# Altium PCB 4Layer_Imposition.PcbDoc
Units mm, origin at the board's own origin, x right, y up, seen from the top; angles counter-clockwise.
Board outline 120 x 170 mm, 4 copper layers (L1, L2, L3, L4), stack 1.486 mm thick; 4 components, 49 nets, 8 pads, 0 vias.
Unrouted connection lines stored in the file: 1.
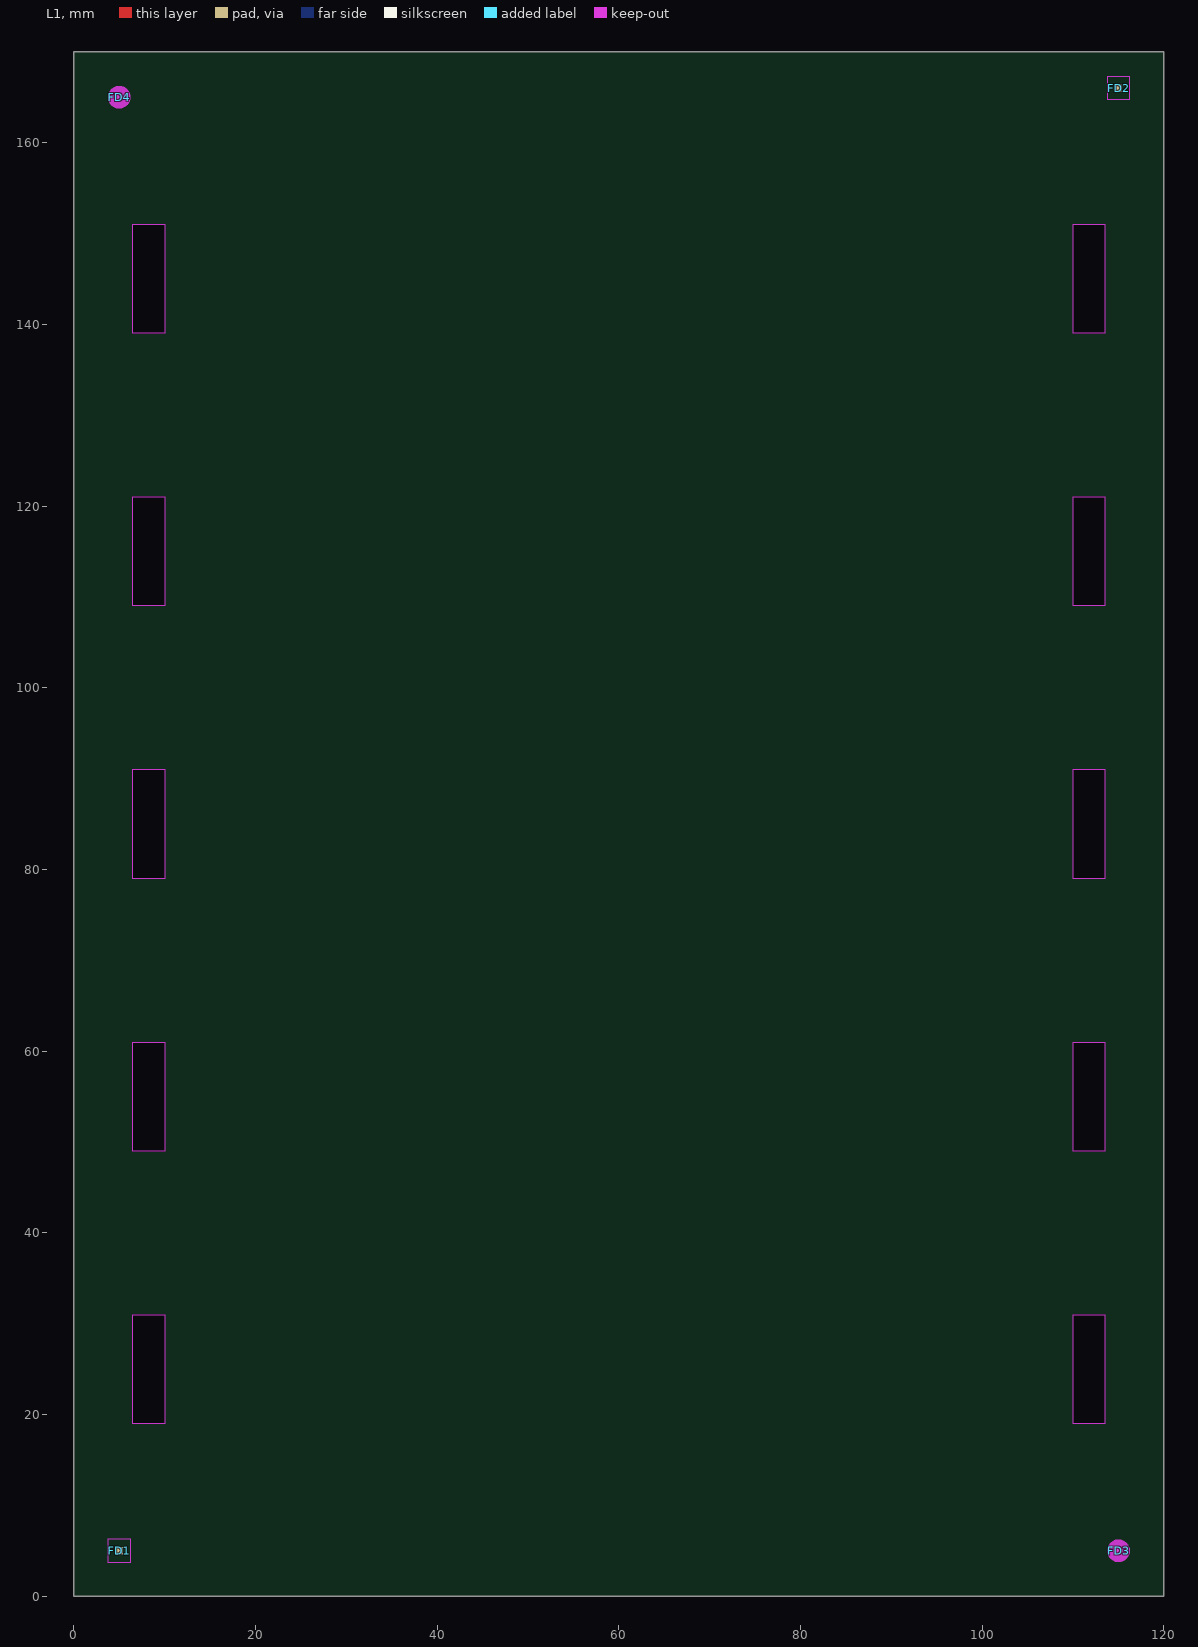
[diagram p0: L1 view]
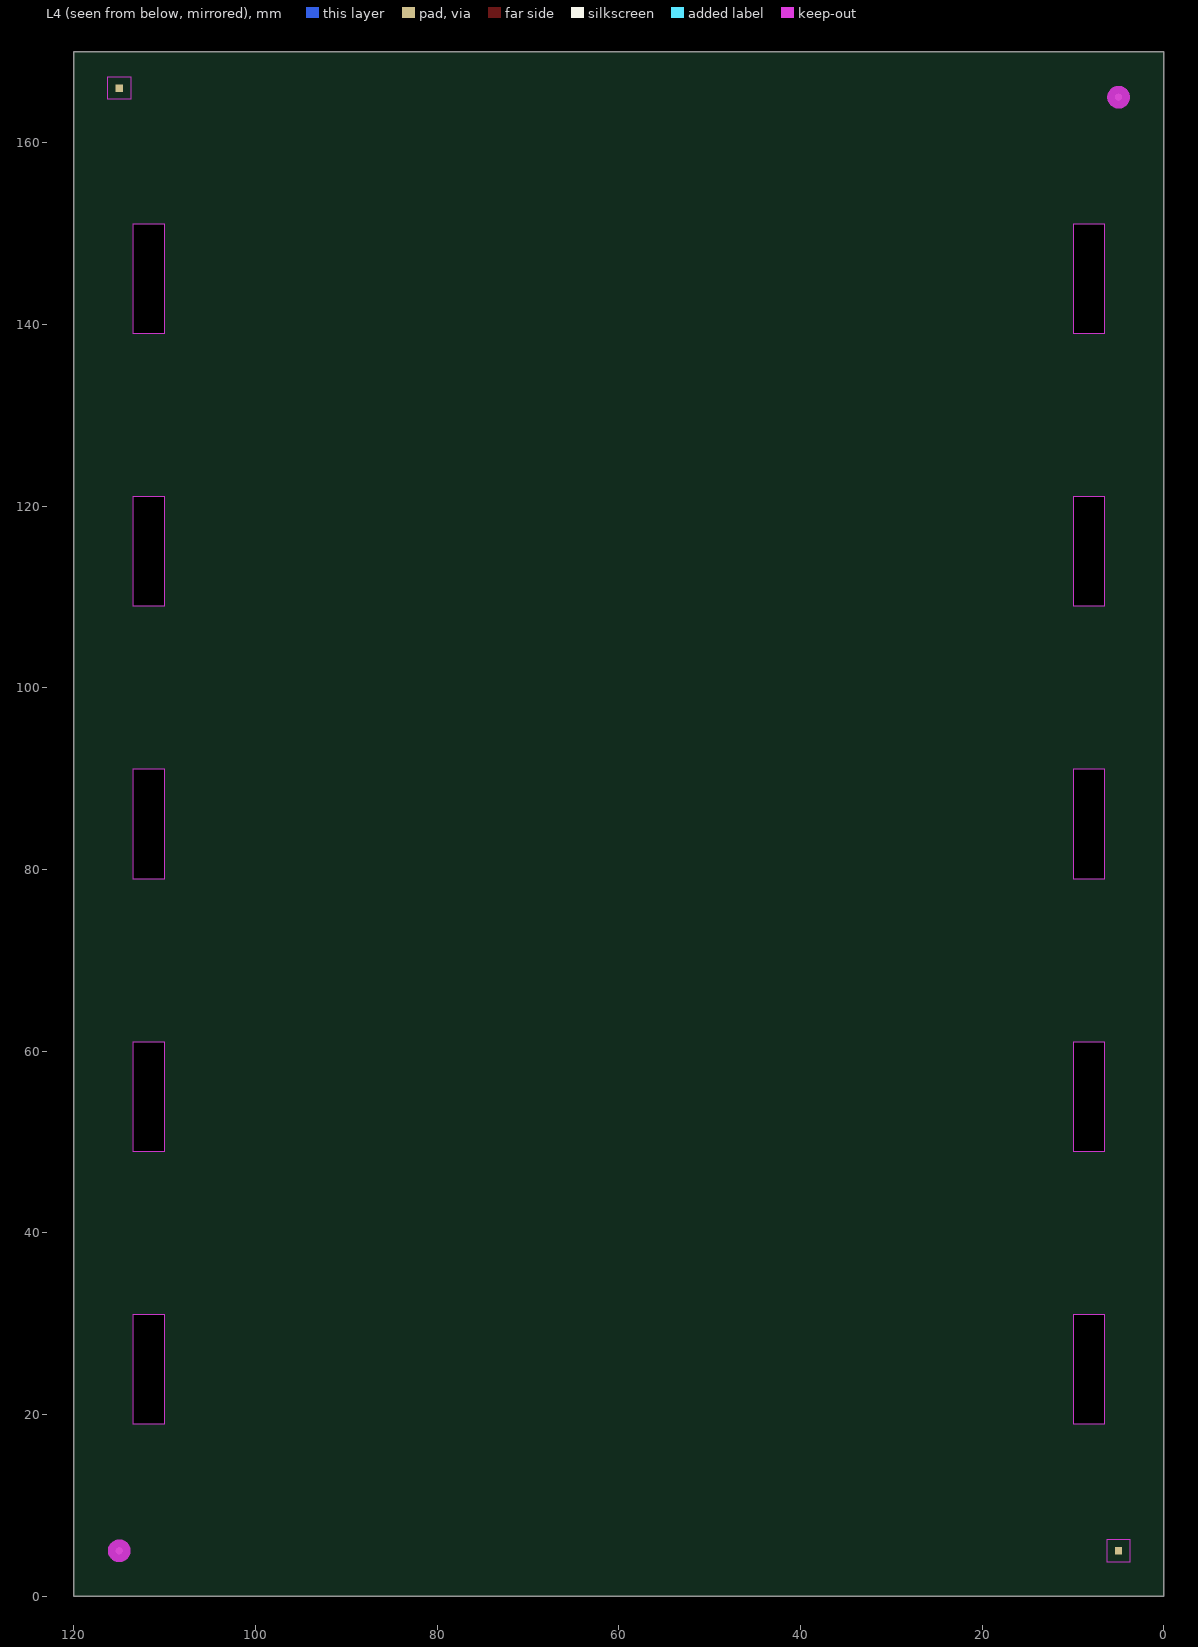
[diagram p1: L4 view, seen from below]
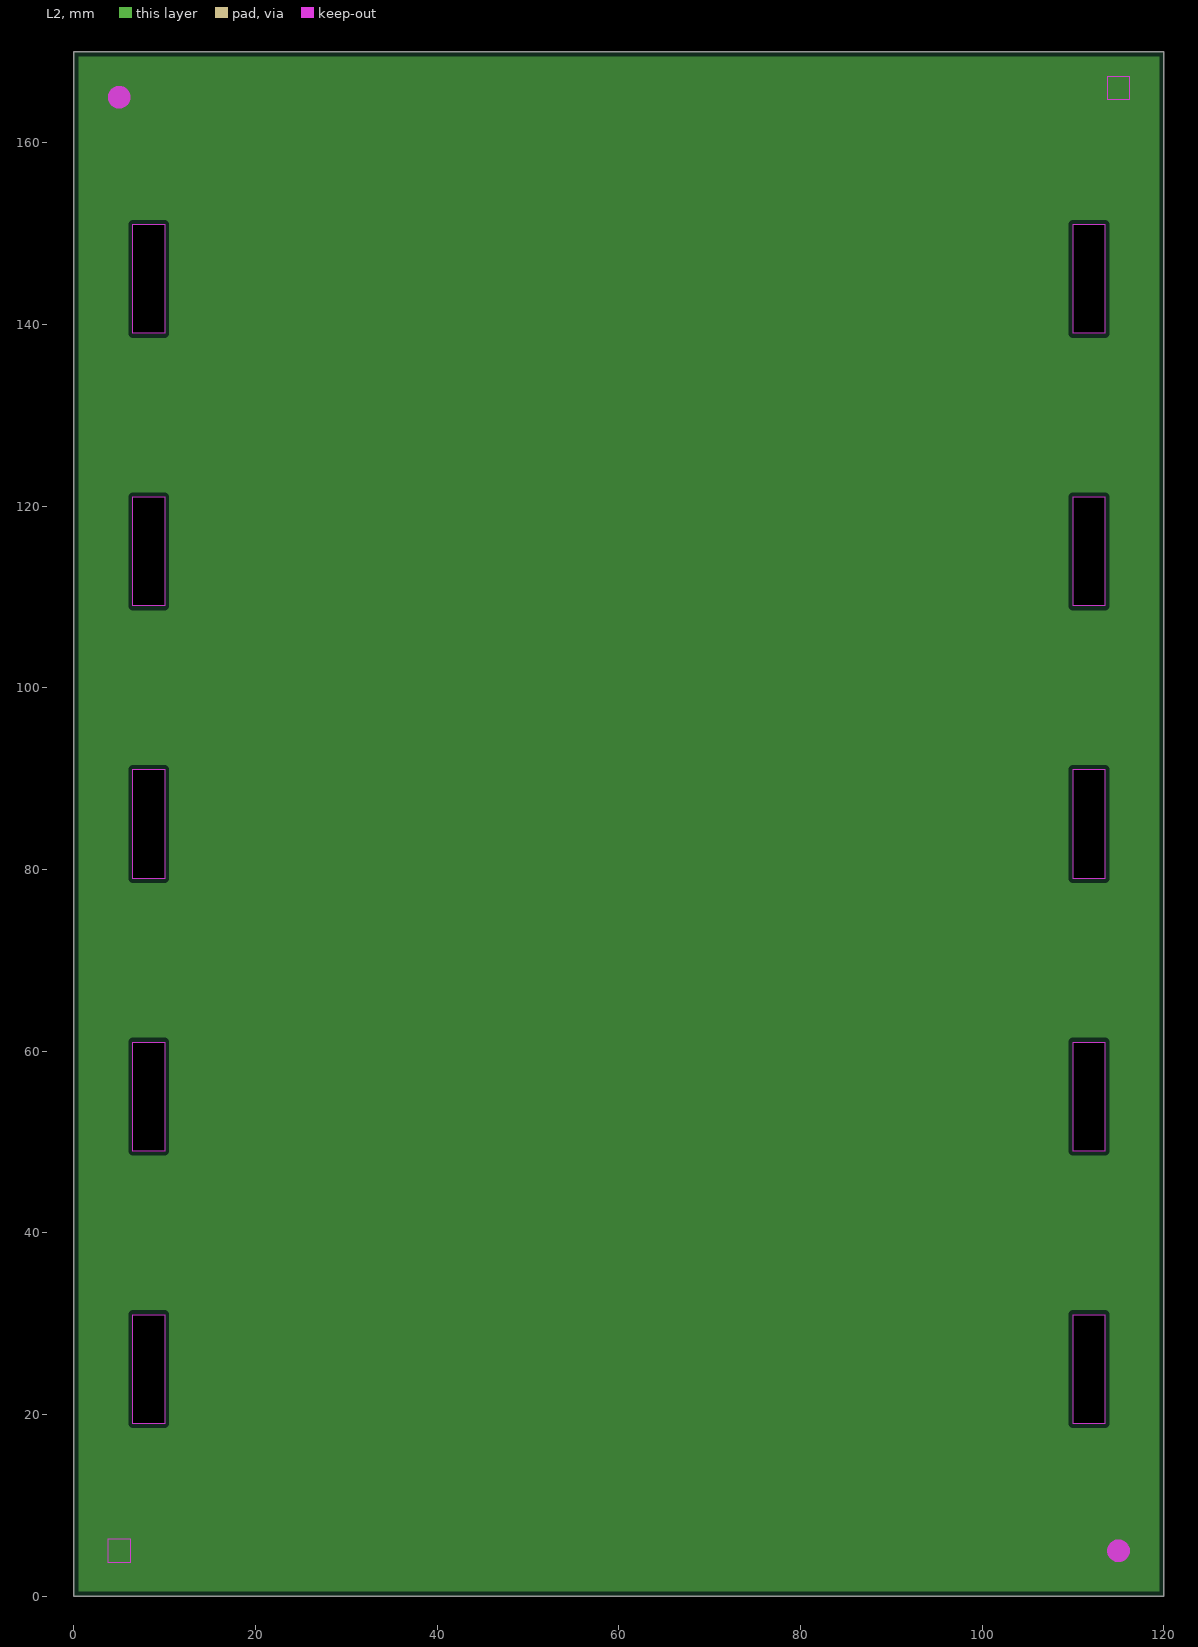
[diagram p2: L2, clearances drawn from the general rule]
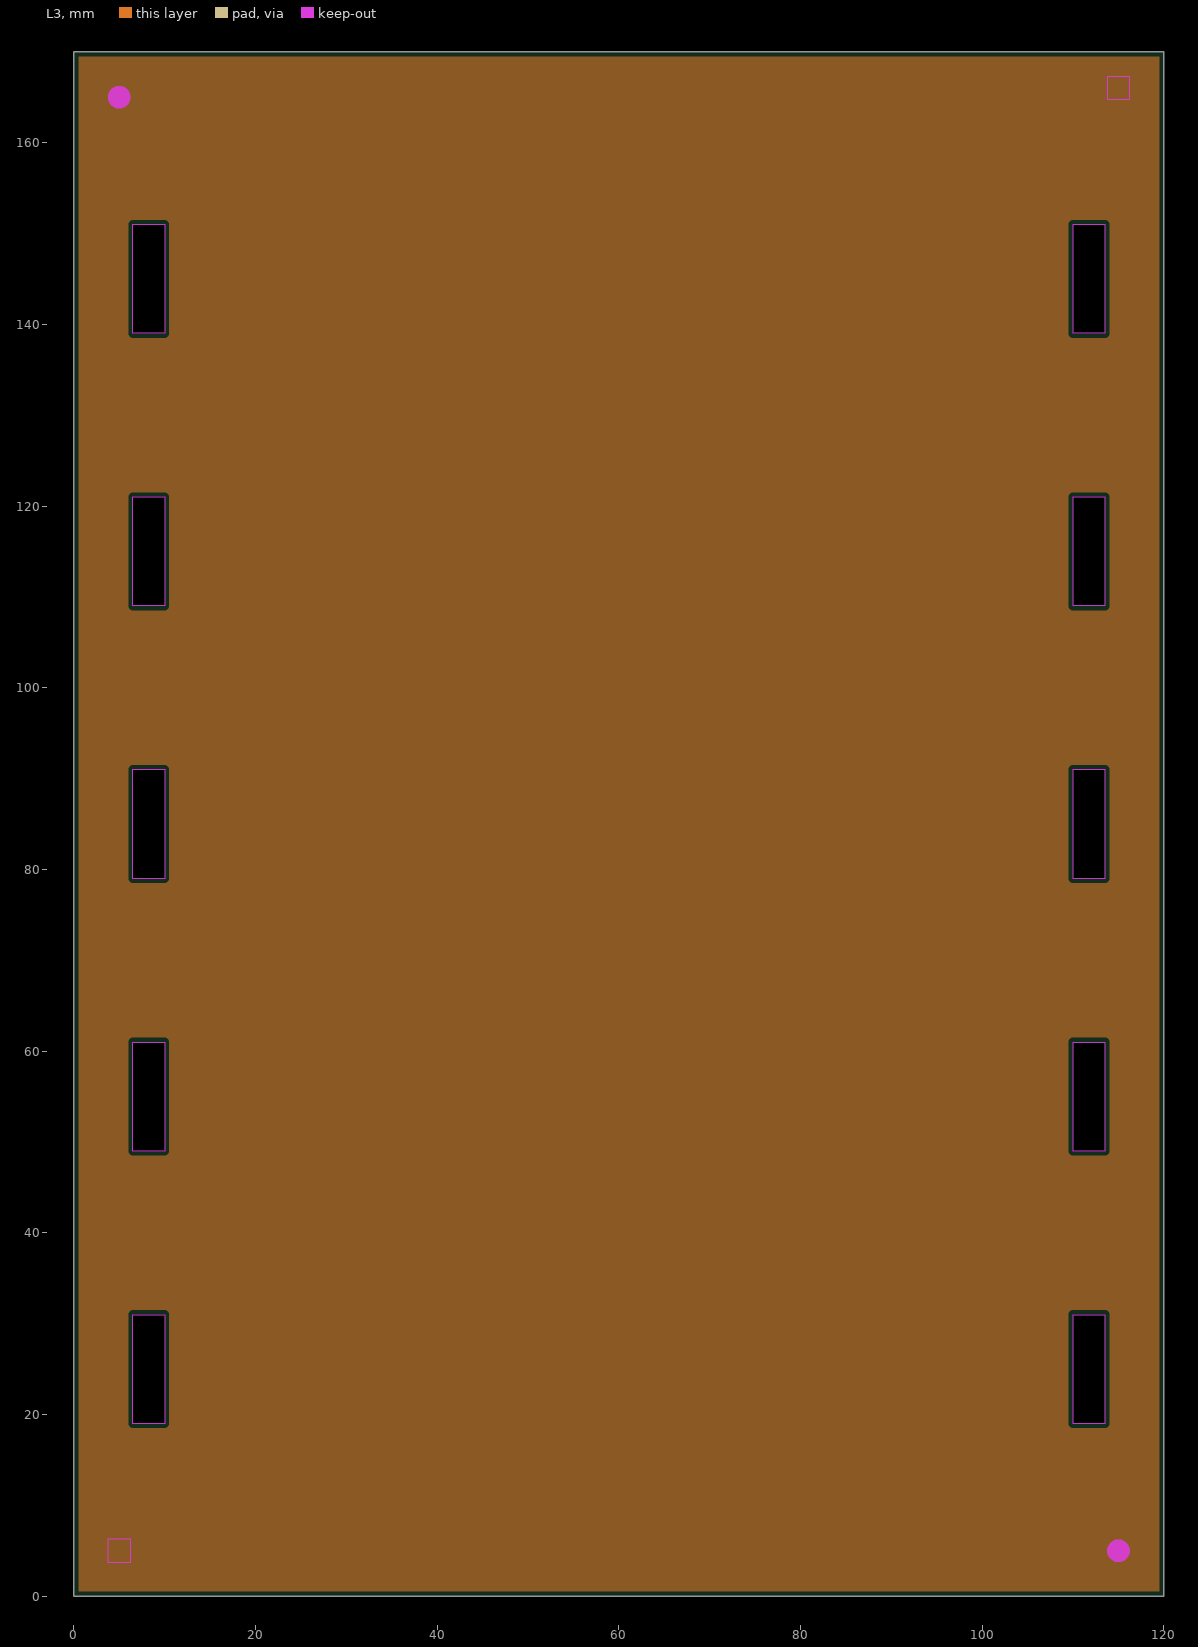
[diagram p3: L3, clearances drawn from the general rule]

## Layer stack, top to bottom
Top Solder: solder mask 0.01, Solder Resist, Dk 3.5
L1: signal copper 0.043
Prepreg: prepreg 0.2, R1551, Dk 4.8
L2: plane copper 0.035, net GND
Core: core 0.93, R1566, Dk 4.8
L3: plane copper 0.035, net (Multiple Nets)
Prepreg: prepreg 0.2, R1551, Dk 4.8
L4: signal copper 0.043
Bottom Solder: solder mask 0.01, Solder Resist, Dk 3.5

## Board outline
0,0 120,0 120,170 0,170
cut-out: 113.5,19 110,19 110,31 113.5,31
cut-out: 113.5,49 110,49 110,61 113.5,61
cut-out: 113.5,79 110,79 110,91 113.5,91
cut-out: 113.5,109 110,109 110,121 113.5,121
cut-out: 113.5,139 110,139 110,151 113.5,151
cut-out: 6.5,151 10,151 10,139 6.5,139
cut-out: 6.5,121 10,121 10,109 6.5,109
cut-out: 6.5,91 10,91 10,79 6.5,79
cut-out: 6.5,61 10,61 10,49 6.5,49
cut-out: 6.5,31 10,31 10,19 6.5,19

## Design rules (kind name [scope] priority, off if disabled: settings)
AcuteAngle [All] p1: minimum=4.50000000000000E+0001 checktracksonly=FALSE
AssemblyTestPointUsage [All] p1: valid=2
Clearance Clearance_BoardEdge_Poly [OnCopper and InPoly vs IsKeepOut] p1: gap=0.5 ignorepadtopadclearanceinfootprint=FALSE except(0: Arc-Hole Track-Hole SMDPad-Hole THPad-Hole Via-Hole Fill-Hole Poly-Hole Region-Hole Text-Hole)
Clearance Clearance_Poly [InPolygon] p2: gap=0.3 ignorepadtopadclearanceinfootprint=FALSE except(0: Arc-Hole Track-Hole SMDPad-Hole THPad-Hole Via-Hole Fill-Hole Poly-Hole Region-Hole Text-Hole)
Clearance [All] p3: gap=0.15 ignorepadtopadclearanceinfootprint=FALSE except(0: Arc-Hole Track-Hole SMDPad-Hole THPad-Hole Via-Hole Fill-Hole Poly-Hole Region-Hole Text-Hole)
DiffPairsRouting [All] p1: maxlimit=0.3 minlimit=0.15 mostfreqgap=0.15 toplayer_minwidth=0.16 toplayer_maxwidth=0.3 toplayer_prefwidth=0.16 bottomlayer_minwidth=0.16 bottomlayer_maxwidth=0.3 bottomlayer_prefwidth=0.16 maxuncoupledlength=5
FabricationTestPointUsage TestPointUsage [All] p1: valid=2 allowmultiple=FALSE
FabricationTestpoint Testpoint [All] p1: side=3 testpointundercomponent=TRUE minsize=1.016 maxsize=2.54 preferedsize=1.524 minholesize=0 maxholesize=1.016 preferedholesize=0.813 testpointgrid=0.025 allowsidetop=TRUE allowsidebottom=TRUE usegrid=TRUE gridtolerance=0
Height [All] p1: minheight=0 maxheight=30 prefheight=12.7
HoleSize [All] p1: absolutevalues=TRUE maxlimit=6 minlimit=0.25 maxpercent=80.000 minpercent=20.000
HoleToHoleClearance [All] p1: gap=0.45 allowstackedmicrovias=TRUE
MinimumAnnularRing [All] p1: minimumring=0.15
MinimumSolderMaskSliver [All] p1: minsoldermaskwidth=0.1
PlaneClearance [All] p1: clearance=0.5
PlaneConnect PlaneConnect_Via [IsVia] p1: planeconnectstyle=Direct reliefexpansion=0.508 reliefentries=4 reliefconductorwidth=0.254 reliefairgap=0.254
PlaneConnect [All] p2: planeconnectstyle=Relief reliefexpansion=0.3 reliefentries=4 reliefconductorwidth=0.3 reliefairgap=0.3
PolygonConnect PolygonConnect_Via [IsVia] p1: connectstyle=Direct reliefconductorwidth=0.254 reliefentries=4 polygonreliefangle="90 Angle" airgapwidth=0.254
PolygonConnect [All] p2: connectstyle=Relief reliefconductorwidth=0.3 reliefentries=4 polygonreliefangle="90 Angle" airgapwidth=0.3
RoutingVias [All] p1: holewidth=0.3 width=0.6 viastyle="Through Hole" minholewidth=0.25 minwidth=0.55 maxholewidth=6 maxwidth=8
SilkToSilkClearance [All] p1 off: silktosilkclearance=0.1
SilkToSolderMaskClearance SilkscreenOverComponentPads [IsPad] p1: minsilkscreentomaskgap=0 clearancetoexposedcopper=FALSE
SolderMaskExpansion [All] p1: expansion=0.05 istentingtop=FALSE
Width [All] p1: maxlimit=10 minlimit=0.127 preferedwidth=0.15
18 further rules are at their usual default settings.

## Components (designator, comment, footprint, x,y, rotation, side; value= is the part's Value field where it differs from the comment)
FD1 "FIDUCIAL SQUARE" "Fiducial square" 5,5 r0 top
FD2 "FIDUCIAL SQUARE" "Fiducial square" 115,166 r0 top (schematic designator FD1)
FD3 "FIDUCIAL CIRCLE" "Fiducial circle" 115,5 r0 top (schematic designator FD2)
FD4 "FIDUCIAL CIRCLE" "Fiducial circle" 5,165 r0 top (schematic designator FD2)

## Footprints (in the part's own frame and the unit in brackets; to place one, negate y for a bottom-side part, rotate by r counter-clockwise, add the part's x,y. Pads: shape width x height; smd on the part's side, far side on the other; paste and mask are expansions set on the pad)
"Fiducial circle" [mm] "認識マーク丸"
  round 0.8 smd paste+0 mask+0.85: FID(0,0)
  round 0.8 smd far side paste+0 mask+0.85: FID(0,0)
  Keep-Out Layer circle w1.25: c0,0 r0.625
"Fiducial square" [mm] "認識マーク四角"
  rect 0.8x0.8 smd paste+0 mask+0.85: FID(0,0)
  rect 0.8x0.8 smd far side paste+0 mask+0.85: FID(0,0)
  Keep-Out Layer region: -1.25,-1.25 1.25,-1.25 1.25,1.25 -1.25,1.25

## Part data
FD1 FD2: "認識マーク四角"
FD3 FD4: "認識マーク丸"

## Nets (pads, with @x,y where several pads share a name; then routed paths per layer and width w, separated by ;. In a path a pad name is that pad's centre, name@x,y a point inside that pad or via, vN(x,y) a via of type N, cw(c..) or ccw(c..) an arc to the next point about the centre after c; other vN are vias at no path point)
+3.3V: 
+5V: 
AIN_BLOOD_SENS: 
BTN_ADC_CHG: 
GND: 
LED_BATT: 
LED_STATUS: 
NetC2_2: 
NetC3_2: 
NetC5_1: 
NetC5_2: 
NetC6_2: 
NetC7_2: 
NetC10_2: 
NetC12_1: 
NetC12_2: 
NetC13_2: 
NetC23_1: 
NetC23_2: 
NetD1_A: 
NetD1_K: 
NetD3_3: 
NetD4_3: 
NetJP1_2: 
NetJP2_1: 
NetJP2_2: 
NetJP6_2: 
NetLED1_A: 
NetLED1_K: 
NetLED2_1: 
NetLED2_3: 
NetPTC1_1: 
NetR4_1: 
NetR5_1: 
NetR6_2: 
NetR10_1: 
NetR12_3: 
NetU4_16: 
NetU4_50: 
NetU4_51: 
NetU4_52: 
RESET: 
SWDCLK: 
SWDIO: 
SWO_TRACEDATA0: 
TRACECLK: 
TRACEDATA1: 
TRACEDATA2: 
TRACEDATA3: 
pads on no net: FD1.FID FD2.FID FD3.FID FD4.FID

## Polygon pours and split planes (outlines as drawn)
GND on L2 (split plane): 119.498,0.502 0.502,0.502 0.502,169.498 119.498,169.498
+3.3V on L3 (split plane): 119.498,0.502 0.502,0.502 0.502,169.498 119.498,169.498

## Silkscreen, mask and mechanical layers (free items; w line width, h text height)
M1 Outline:
  lines w0.2: 10,19 6.5,19 6.5,31 10,31 ; 10,49 6.5,49 6.5,61 10,61 ; 10,79 6.5,79 6.5,91 10,91 ; 10,109 6.5,109 6.5,121 10,121 ; 10,139 6.5,139 6.5,151 10,151 ; 110,19 113.5,19 113.5,31 110,31 ; 110,49 113.5,49 113.5,61 110,61 ; 110,79 113.5,79 113.5,91 110,91 ; 110,109 113.5,109 113.5,121 110,121 ; 110,139 113.5,139 113.5,151 110,151 ; 0,0 120,0 120,170 0,170 0,0
M3 3D Top:
  text ".Layer_Name" at -11,-44.5 h3.1
M4 3D Bottom:
  text ".Layer_Name" at -11,-44.5 h3.1
M8 Panelize Dimension:
  circle w0.254: c0,0 r1.414
  lines w0.2: -1.5,-1.5 1.5,1.5 ; -1.5,1.5 1.5,-1.5
  text "(115,166)" at 115,166 h1.52
  text "(5,165)" at 5,165 h1.52
  text "(5,5)" at 5,5 h1.52
  text "(115,5)" at 115,5 h1.52
  text "(0,0)" at 0.5,-3.5 h1.52
M9 Router:
  region: 113.5,31 110,31 110,19 113.5,19
  region: 113.5,61 110,61 110,49 113.5,49
  region: 113.5,91 110,91 110,79 113.5,79
  region: 113.5,121 110,121 110,109 113.5,109
  region: 113.5,151 110,151 110,139 113.5,139
  rectangle: 6.5,139 10,151
  rectangle: 6.5,109 10,121
  rectangle: 6.5,79 10,91
  rectangle: 6.5,49 10,61
  rectangle: 6.5,19 10,31
M10 V Score:
  lines w0.5: -8,70 124,70 ; -8,100 124,100 ; -7,10 125,10 ; -7,40 125,40 ; -7,130 125,130 ; -6,160 126,160 ; 10,-7 10,179 ; 60,-8 60,178 ; 110,-8 110,178
  text "Vcut" at 60.254,181.254 h3
  text "Vcut" at 10.254,180.254 h3
  text "Vcut" at 110.254,180.254 h3
  text "Vcut" at -18.746,160.254 h3
  text "Vcut" at -18.746,130.254 h3
  text "Vcut" at -18.746,100.254 h3
  text "Vcut" at -18.746,70.254 h3
  text "Vcut" at -18.746,40.254 h3
  text "Vcut" at -18.746,9.254 h3
M16 Tolerance:
  text ".Layer_Name" at -11,-44.5 h3.1

## Dimensions
0,0 to 0,170 on M8 Panelize Dimension
0,0 to 120,0 on M8 Panelize Dimension

## Panel: embedded boards
"4Layer.PcbDoc" at 10,10, 1 rows x 1 columns, spacing 63.5 x 38.1, rotation 0
"4Layer.PcbDoc" at 10,40, 1 rows x 1 columns, spacing 63.5 x 38.1, rotation 0
"4Layer.PcbDoc" at 110,160, 1 rows x 1 columns, spacing 63.5 x 38.1, rotation 180
"4Layer.PcbDoc" at 110,130, 1 rows x 1 columns, spacing 63.5 x 38.1, rotation 180
"4Layer.PcbDoc" at 110,100, 1 rows x 1 columns, spacing 63.5 x 38.1, rotation 180
"4Layer.PcbDoc" at 110,70, 1 rows x 1 columns, spacing 63.5 x 38.1, rotation 180
"4Layer.PcbDoc" at 110,40, 1 rows x 1 columns, spacing 63.5 x 38.1, rotation 180
"4Layer.PcbDoc" at 10,130, 1 rows x 1 columns, spacing 63.5 x 38.1, rotation 0
"4Layer.PcbDoc" at 10,100, 1 rows x 1 columns, spacing 63.5 x 38.1, rotation 0
"4Layer.PcbDoc" at 10,70, 1 rows x 1 columns, spacing 63.5 x 38.1, rotation 0